# Altium PCB bob_breakout-layout.PcbDoc (part 1 of 2)
Units mil, origin at the board's own origin, x right, y up, seen from the top; angles counter-clockwise.
Board outline 6141.73 x 4531.01 mil, 4 copper layers (Top Copper, Signal Layer 1, Signal Layer 2, Bottom Copper), stack 61.811 mil thick; 106 components, 121 nets, 504 pads, 390 vias.
Unrouted connection lines stored in the file: 19.
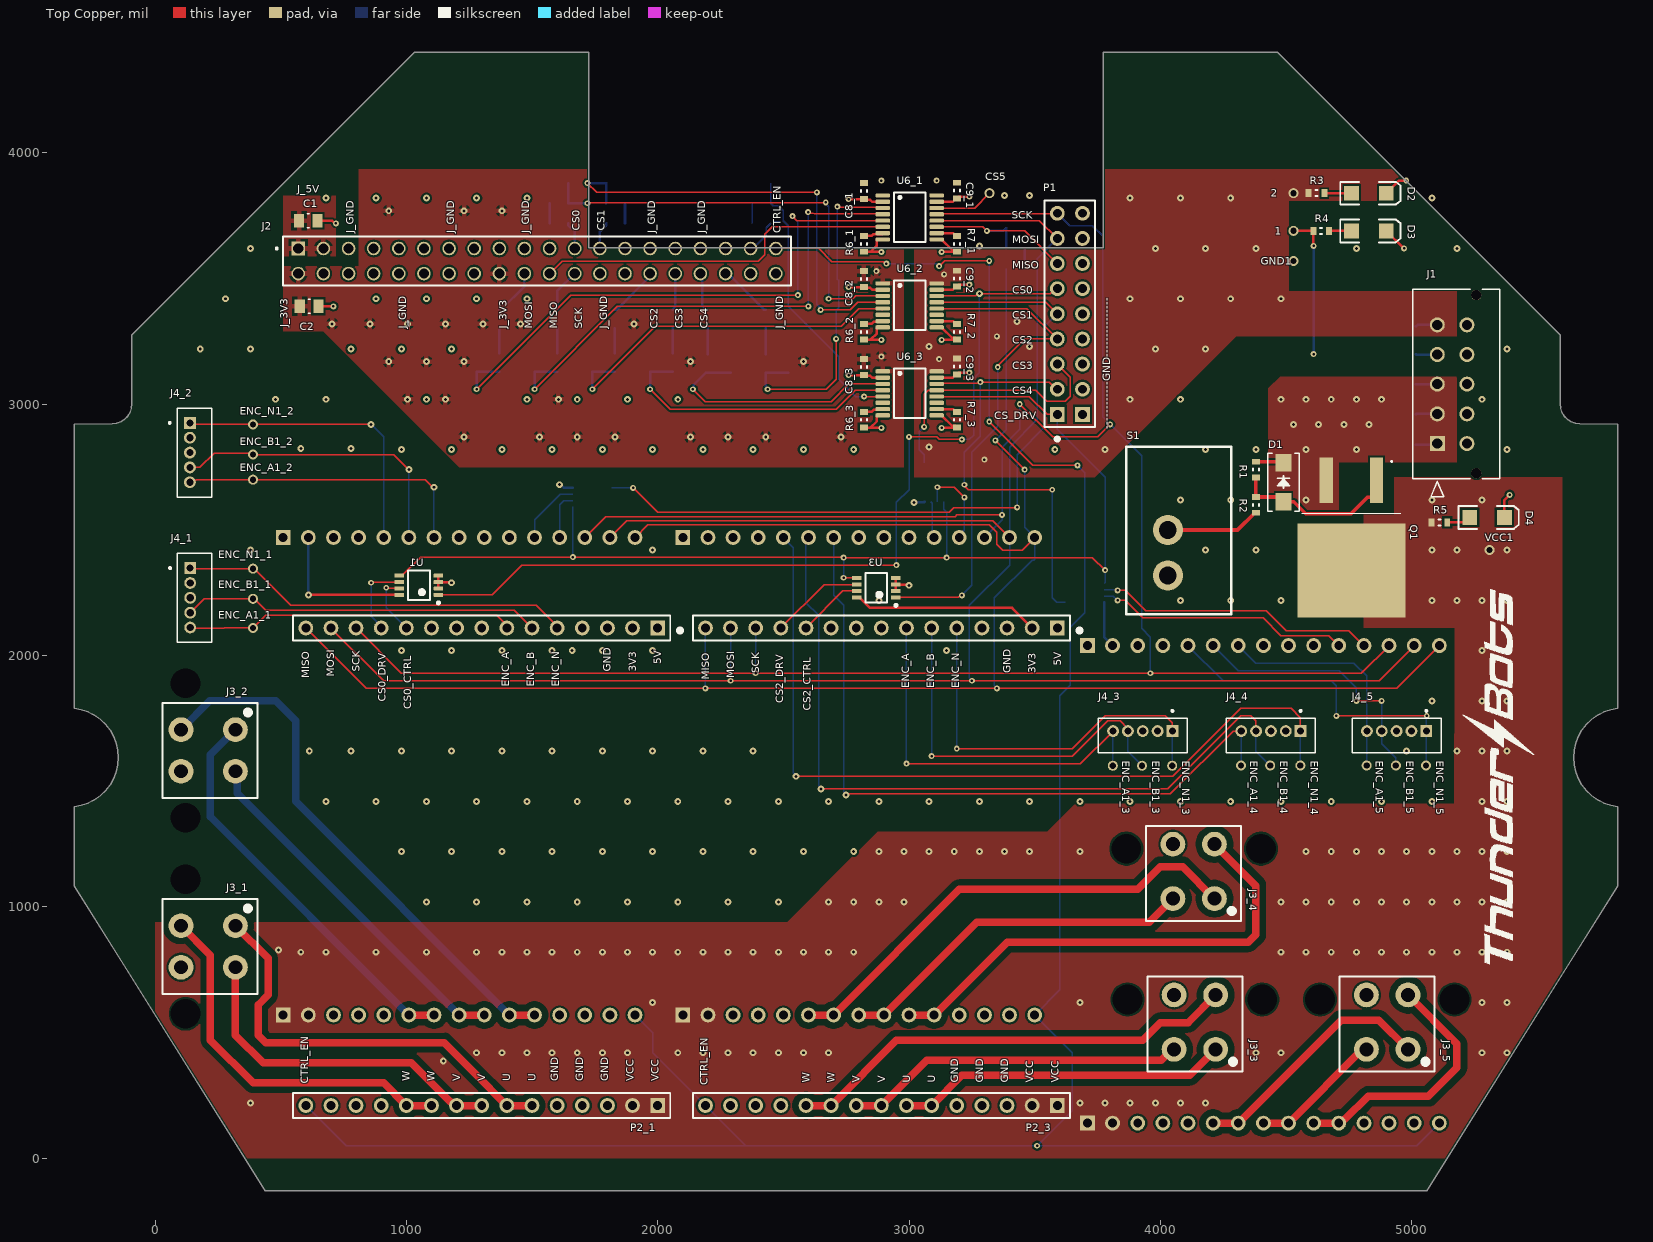
[diagram p0: Top Copper view]
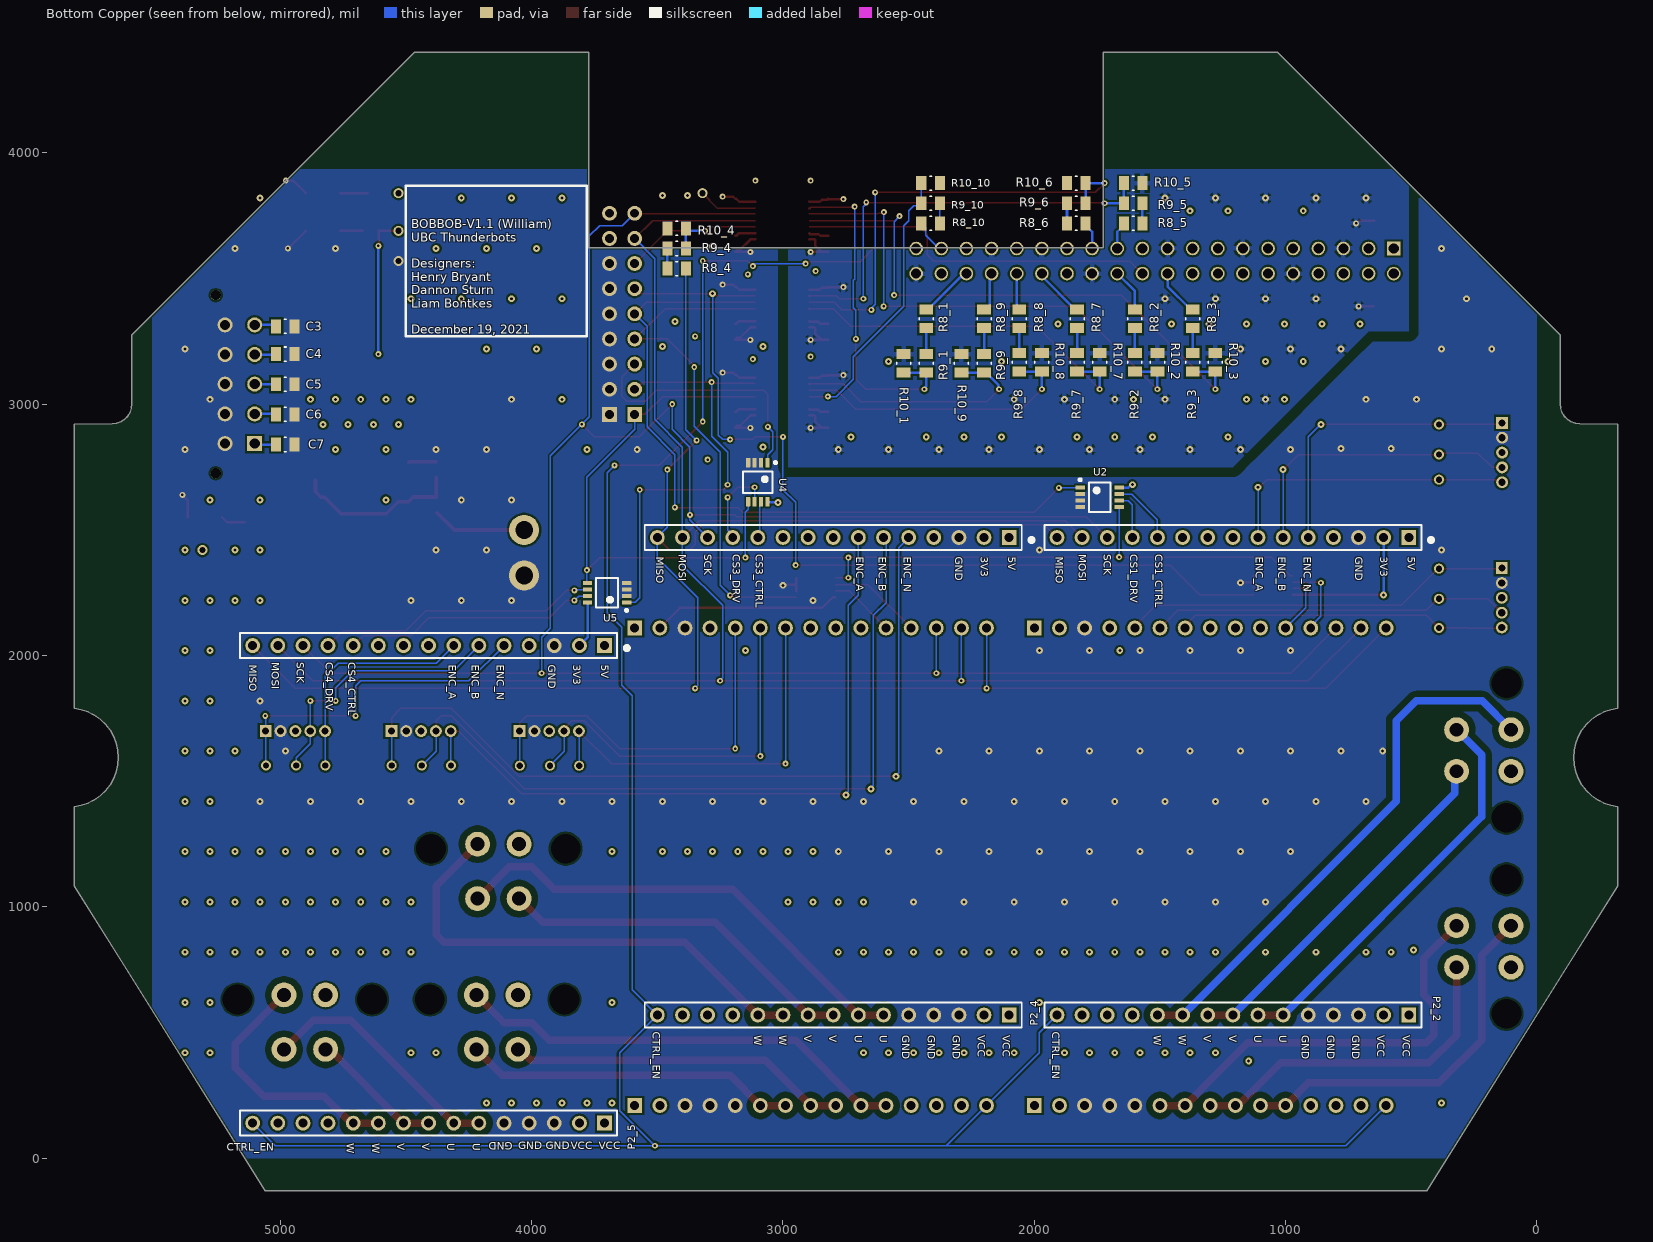
[diagram p1: Bottom Copper view, seen from below]
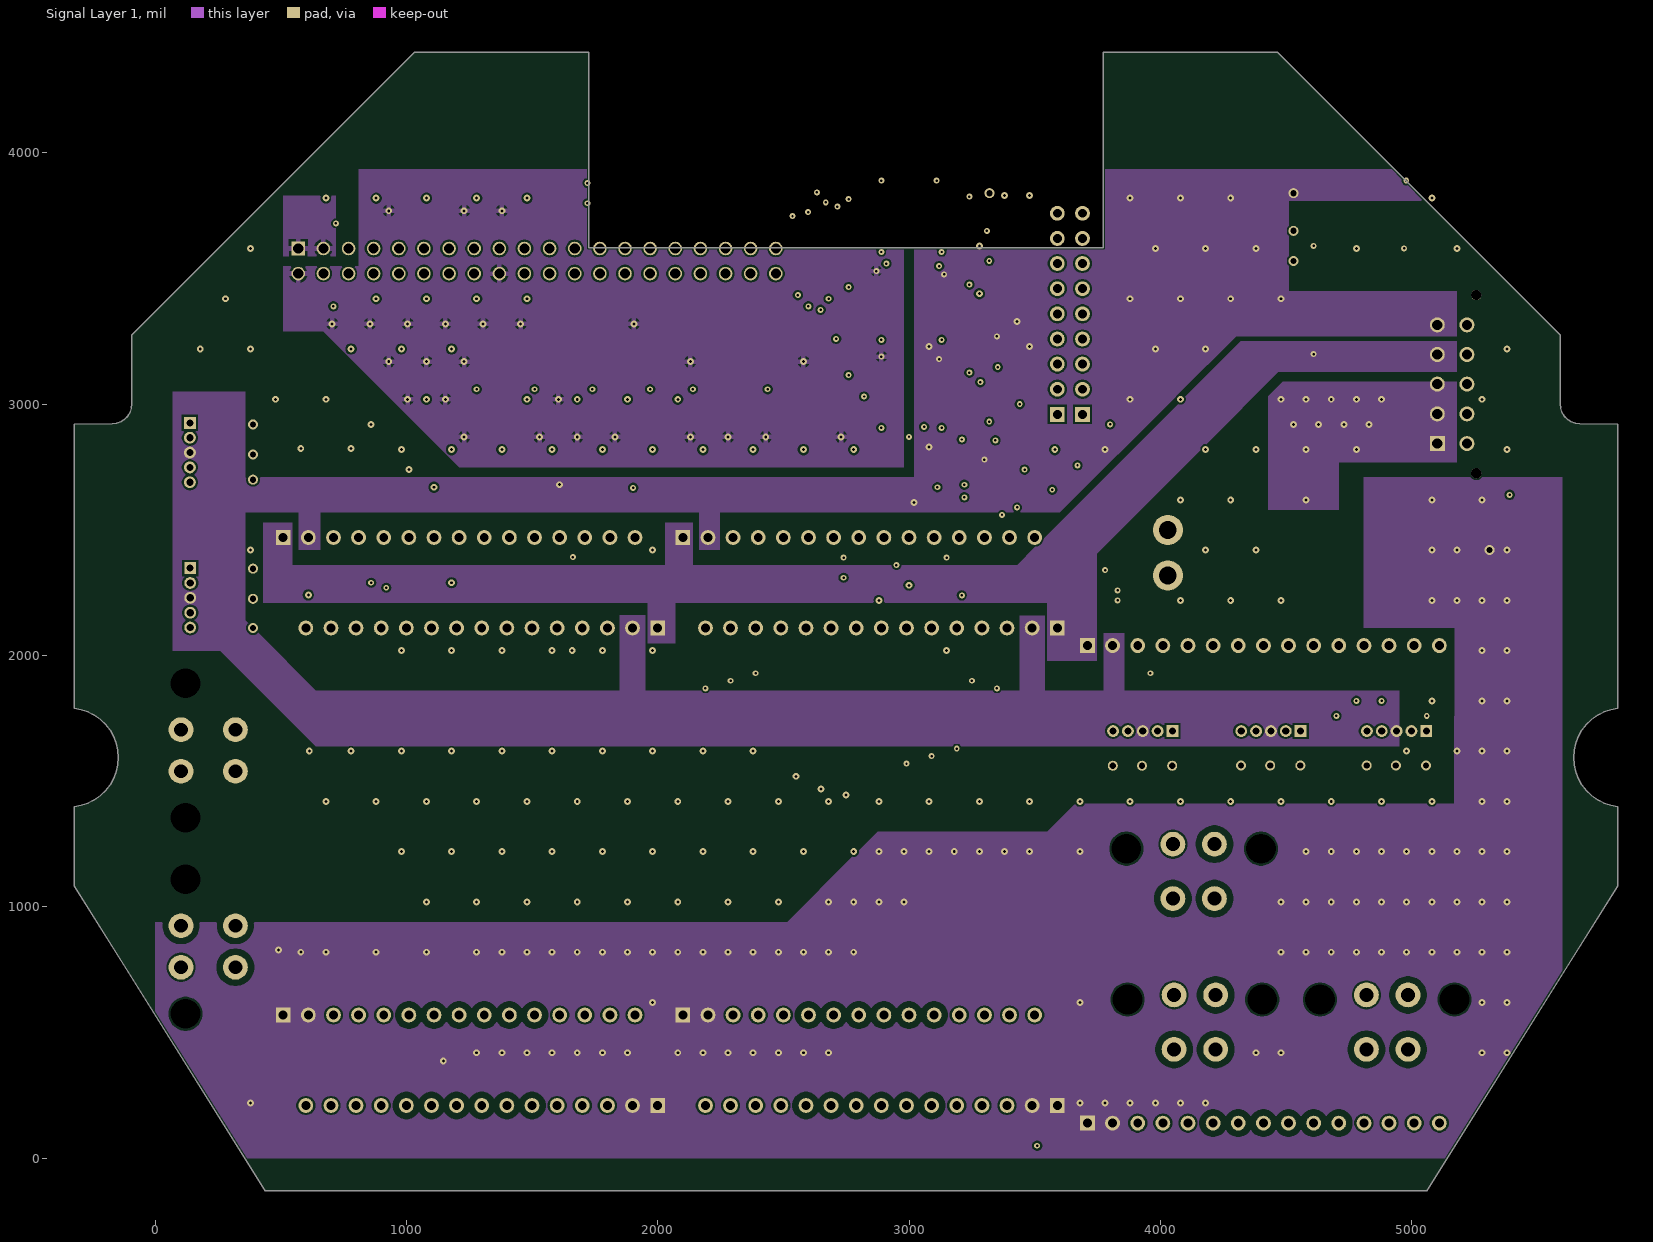
[diagram p2: Signal Layer 1]
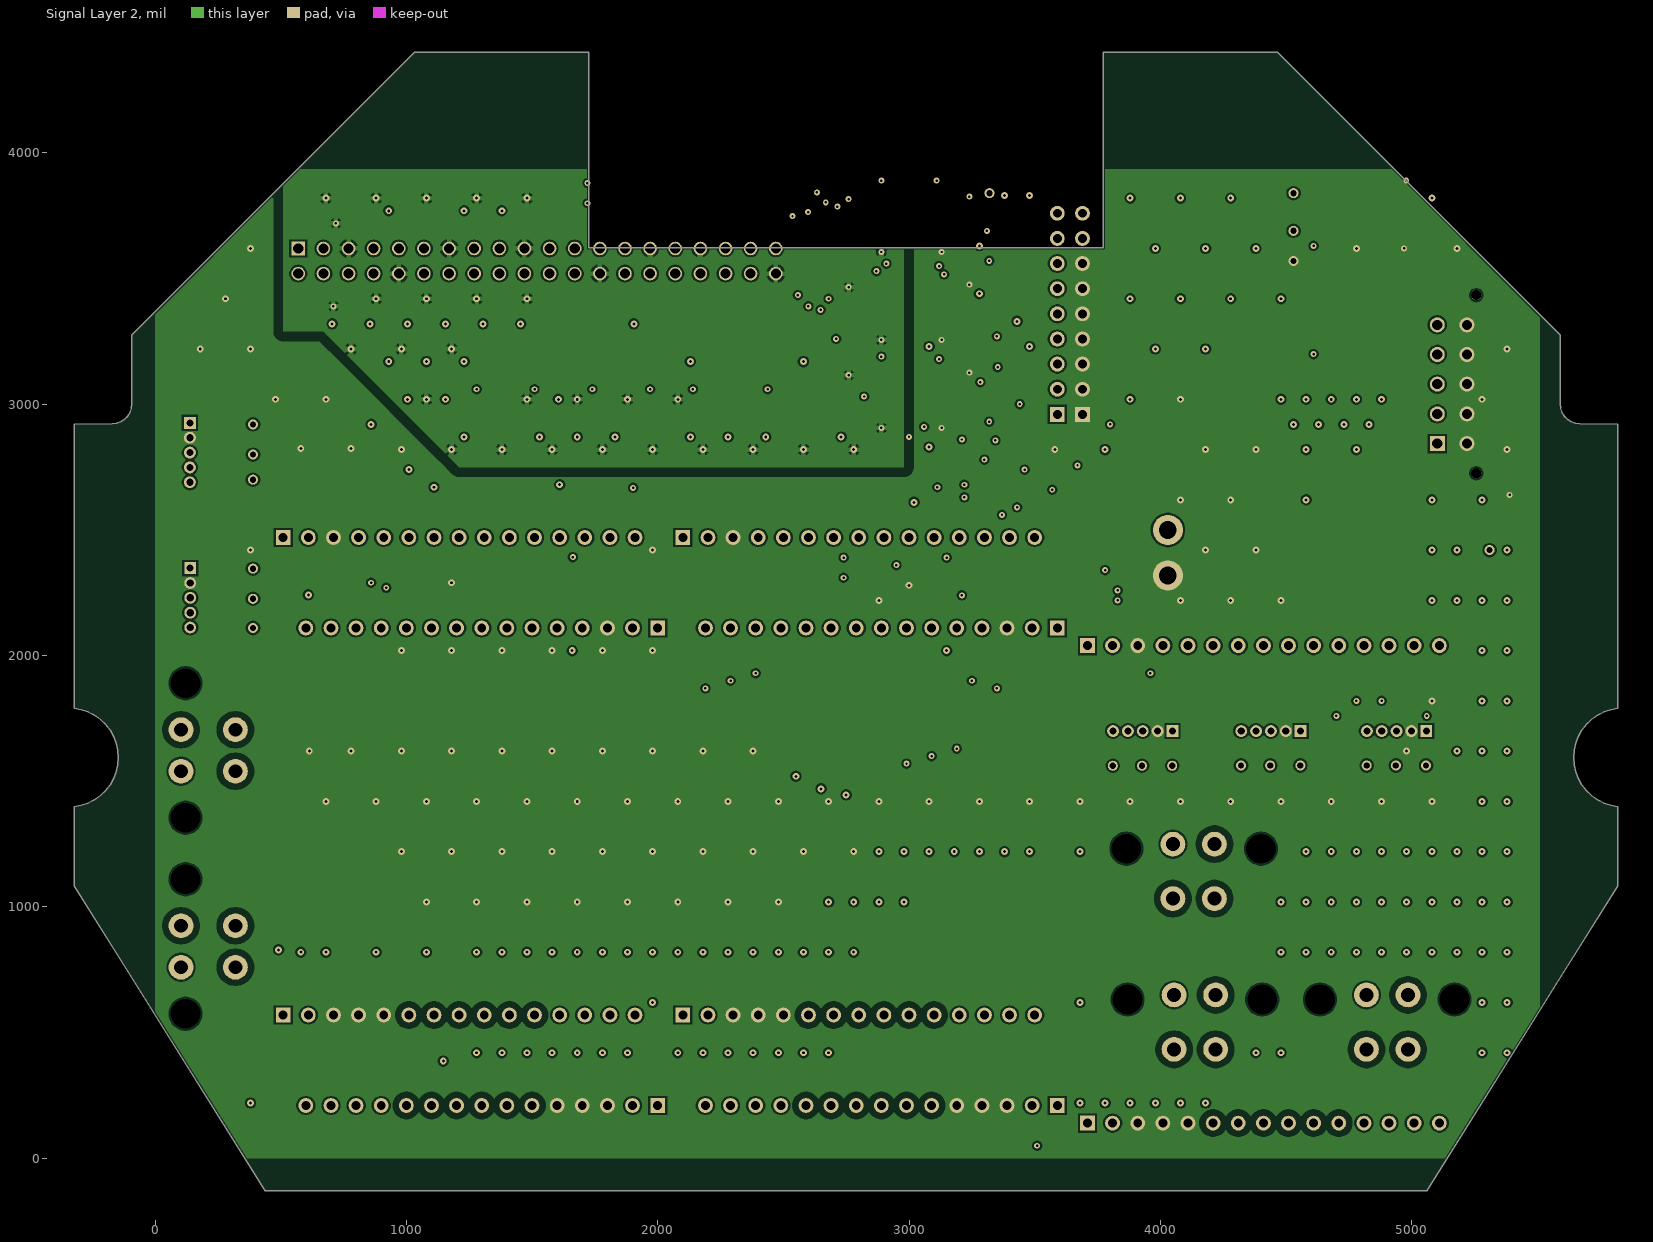
[diagram p3: Signal Layer 2]

## Layer stack, top to bottom
Top Mask: solder mask 0.5906, Solder Resist, Dk 3.8
Top Copper: signal copper 1.378
Dielectric 1: prepreg 3.937, 2313, Dk 4.05
Signal Layer 1: signal copper 0.689
Core: core 49.8031, FR-4, Dk 4.5
Signal Layer 2: signal copper 0.689
Dielectric 2: prepreg 3.937, 2313, Dk 4.05
Bottom Copper: signal copper 1.378
Bottom Mask: solder mask 0.5906, Solder Resist, Dk 3.8

## Board outline
-321.57,1084.08 -321.57,1399.04 -293.3,1404.24 -266.06,1413.49 -240.47,1426.6 -217.04,1443.33 -196.33,1463.29 -178.74,1486.05 -164.68,1511.09 -154.4,1537.98 -148.14,1566.05 -146.02,1594.71 -148.14,1623.41 -154.4,1651.48 -164.68,1678.33 -178.74,1703.41 -196.33,1726.17 -217.04,1746.13 -240.47,1762.82 -266.06,1775.97 -293.3,1785.22 -321.57,1790.42 -321.57,2921.01 -170.35,2922.78 -152.83,2924.75 -136.18,2930.57 -121.26,2939.94 -108.77,2952.43 -99.4,2967.35 -93.58,2984 -91.61,3001.52 -91.61,3276.44 1032.96,4401.01 1725.67,4401.01 1725.67,3622.35 3772.92,3622.35 3772.92,4401.01 4465.58,4401.01 5590.2,3276.44 5590.2,3001.52 5592.17,2984 5598,2967.35 5607.37,2952.43 5619.85,2939.94 5634.77,2930.57 5651.42,2924.75 5668.94,2922.78 5820.16,2921.01 5820.16,1790.42 5791.86,1785.22 5764.65,1775.97 5739.06,1762.86 5715.63,1746.13 5694.93,1726.17 5677.33,1703.41 5663.27,1678.33 5653,1651.48 5646.74,1623.41 5644.61,1594.71 5646.74,1566.05 5653,1537.98 5663.27,1511.09 5677.33,1486.05 5694.93,1463.29 5715.63,1443.33 5739.06,1426.6 5764.65,1413.49 5791.86,1404.24 5820.16,1399.04 5820.16,1084.08 5609.93,748.33 5060,-130 438.59,-130 -111.33,748.33

## Design rules (kind name [scope] priority, off if disabled: settings)
BoardOutlineClearance [All] p1: gap=7.87 ignorepadtopadclearanceinfootprint=FALSE except(15.75: Arc-SplitBarrior Arc-SplitContinuation Track-SplitBarrior Track-SplitContinuation SMDPad-SplitBarrior SMDPad-SplitContinuation THPad-SplitBarrior THPad-SplitContinuation Via-SplitBarrior Via-SplitContinuation Fill-SplitBarrior Fill-SplitContinuation Poly-SplitBarrior Poly-SplitContinuation Region-SplitBarrior Region-SplitContinuation Text-SplitBarrior Text-SplitContinuation)
Clearance "Stitching VCC" [IsStitchingVia and InNet('VCC') vs (IsVia and (Not IsStitchingVia)) Or IsPad] p1: gap=20 ignorepadtopadclearanceinfootprint=FALSE
Clearance Clearance_Phases [InNetClass('Phases')] p2: gap=25 ignorepadtopadclearanceinfootprint=TRUE except(10: Arc-THPad Arc-Hole Track-THPad Track-Hole SMDPad-Hole THPad-Hole Via-Hole Fill-Hole Poly-Hole Region-Hole Text-Hole)
Clearance Clearance_Region_Poly_VCC [IsRegion AND (InNetClass('VCC')) vs IsRegion] p3: gap=40 ignorepadtopadclearanceinfootprint=TRUE
Clearance [All] p4: gap=8 ignorepadtopadclearanceinfootprint=TRUE except(10: Arc-Text Track-Text SMDPad-Text THPad-Text Via-Text Fill-Text Poly-Text Region-Text Text-Text)
HoleSize [All] p1: absolutevalues=TRUE maxlimit=248.03 minlimit=7.87 maxpercent=80.000 minpercent=20.000
MinimumAnnularRing [All] p1: minimumring=3
MinimumSolderMaskSliver [All] p1: minsoldermaskwidth=3.94
PolygonConnect PolygonConnect_VCC [All vs InNet('VCC')] p1: connectstyle=Direct reliefconductorwidth=20 reliefentries=4 polygonreliefangle="90 Angle" airgapwidth=10
PolygonConnect PolygonConnect_5V [All vs InNet('5V')] p2: connectstyle=Direct reliefconductorwidth=20 reliefentries=4 polygonreliefangle="90 Angle" airgapwidth=10
PolygonConnect PolygonConnect_3V3 [All vs InNet('3V3')] p3: connectstyle=Direct reliefconductorwidth=20 reliefentries=4 polygonreliefangle="90 Angle" airgapwidth=10
PolygonConnect PolygonConnect_GND [All vs InNet('GND')] p4: connectstyle=Direct reliefconductorwidth=20 reliefentries=4 polygonreliefangle="90 Angle" airgapwidth=10
PolygonConnect PolygonConnect_VCC_CONN [All vs InNet('VCC_CONN')] p5: connectstyle=Direct reliefconductorwidth=20 reliefentries=4 polygonreliefangle="90 Angle" airgapwidth=10
PolygonConnect PolygonConnect_5V_CONN [All vs InNet('5V_CONN')] p6: connectstyle=Direct reliefconductorwidth=20 reliefentries=4 polygonreliefangle="90 Angle" airgapwidth=10
PolygonConnect PolygonConnect_3V3_CONN [All vs InNet('3V3_CONN')] p7: connectstyle=Direct reliefconductorwidth=20 reliefentries=4 polygonreliefangle="90 Angle" airgapwidth=10
PolygonConnect [All] p8: connectstyle=Relief reliefconductorwidth=20 reliefentries=4 polygonreliefangle="90 Angle" airgapwidth=10
RoomDefinition U_bob_encoder_4 [InComponentClass('U_bob_encoder_4')] p1: confinementstyle=ConfineIn formatcopy=TRUE lockcomponents=FALSE outline 4741.06,1807.44 5137.05,1807.44 5137.05,1602.04 5091.17,1602.04 5091.17,1528.83 4786.94,1528.83 4786.94,1602.04 4741.06,1602.04
RoomDefinition U_bob_encoder_2 [InComponentClass('U_bob_encoder_2')] p2: confinementstyle=ConfineIn formatcopy=TRUE lockcomponents=FALSE outline 3731.06,1806.5 4127.05,1806.5 4127.05,1601.09 4081.17,1601.09 4081.17,1527.89 3776.94,1527.89 3776.94,1601.09 3731.06,1601.09
RoomDefinition U_bob_encoder_3 [InComponentClass('U_bob_encoder_3')] p3: confinementstyle=ConfineIn formatcopy=TRUE lockcomponents=FALSE outline 4241.06,1807.44 4637.05,1807.44 4637.05,1602.04 4591.17,1602.04 4591.17,1528.83 4286.94,1528.83 4286.94,1602.04 4241.06,1602.04
RoomDefinition U_bob_encoder_1 [InComponentClass('U_bob_encoder_1')] p4: confinementstyle=ConfineIn formatcopy=TRUE lockcomponents=FALSE outline 30,3020 390,3020 440,2970 440,2610 400,2570 30,2570
RoomDefinition U_bob_encoder_0 [InComponentClass('U_bob_encoder_0')] p5: confinementstyle=ConfineIn formatcopy=TRUE lockcomponents=FALSE outline 40,2440 40,2000 60,1980 460,1980 460,2440
RoomDefinition U_low-pass-filter_9 [InComponentClass('U_low-pass-filter_9')] p6: confinementstyle=ConfineIn formatcopy=TRUE lockcomponents=FALSE outline 2150,3668 2830,3668 2830,3928 2150,3928
RoomDefinition U_isolation_1 [InComponentClass('U_isolation_1')] p7: confinementstyle=ConfineIn formatcopy=TRUE lockcomponents=FALSE outline 2730,3227.01 3276.44,3227.01 3276.44,3570 2730,3570
RoomDefinition U_low-pass-filter_5 [InComponentClass('U_low-pass-filter_5')] p8: confinementstyle=ConfineIn formatcopy=TRUE lockcomponents=FALSE outline 1756,3930 2086,3930 2086,3670 1756,3670
RoomDefinition U_low-pass-filter_6 [InComponentClass('U_low-pass-filter_6')] p9: confinementstyle=ConfineIn formatcopy=TRUE lockcomponents=FALSE outline 1640,2900 1870,2900 1870,3440 1640,3440
RoomDefinition U_isolation_0 [InComponentClass('U_isolation_0')] p10: confinementstyle=ConfineIn formatcopy=TRUE lockcomponents=FALSE outline 2730,3577.01 3276.44,3577.01 3276.44,3920 2730,3920
RoomDefinition U_low-pass-filter_4 [InComponentClass('U_low-pass-filter_4')] p11: confinementstyle=ConfineIn formatcopy=TRUE lockcomponents=FALSE outline 1680,3930 1354,3930 1354,3670 1680,3670
RoomDefinition U_low-pass-filter_8 [InComponentClass('U_low-pass-filter_8')] p12: confinementstyle=ConfineIn formatcopy=TRUE lockcomponents=FALSE outline 2100,2900 2330,2900 2330,3440 2100,3440
RoomDefinition U_low-pass-filter_1 [InComponentClass('U_low-pass-filter_1')] p13: confinementstyle=ConfineIn formatcopy=TRUE lockcomponents=FALSE outline 1410,2900 1640,2900 1640,3440 1410,3440
RoomDefinition U_low-pass-filter_2 [InComponentClass('U_low-pass-filter_2')] p14: confinementstyle=ConfineIn formatcopy=TRUE lockcomponents=FALSE outline 1180,2900 1410,2900 1410,3440 1180,3440
RoomDefinition U_low-pass-filter_7 [InComponentClass('U_low-pass-filter_7')] p15: confinementstyle=ConfineIn formatcopy=TRUE lockcomponents=FALSE outline 1870,2900 2100,2900 2100,3440 1870,3440
RoomDefinition U_low-pass-filter_0 [InComponentClass('U_low-pass-filter_0')] p16: confinementstyle=ConfineIn formatcopy=TRUE lockcomponents=FALSE outline 2330,2900 2560,2900 2560,3440 2330,3440
RoomDefinition U_low-pass-filter_3 [InComponentClass('U_low-pass-filter_3')] p17: confinementstyle=ConfineIn formatcopy=TRUE lockcomponents=FALSE outline 3160,3490 3497,3490 3497,3750 3160,3750
RoomDefinition U_isolation_2 [InComponentClass('U_isolation_2')] p18: confinementstyle=ConfineIn formatcopy=TRUE lockcomponents=FALSE outline 2730,2877.01 3276.44,2877.01 3276.44,3220 2730,3220
RoutingCorners [All] p1: cornerstyle=Round minsetback=100 maxsetback=100
RoutingVias [All] p1: holewidth=19.68 width=39.37 viastyle="Through Hole" minholewidth=7.87 minwidth=17.72 maxholewidth=39.37 maxwidth=78.74
SilkToSilkClearance [All] p1: silktosilkclearance=3.94
SilkToSolderMaskClearance [IsPad] p1: minsilkscreentomaskgap=3.94 clearancetoexposedcopper=TRUE
SolderMaskExpansion [All] p1: expansion=4 istentingtop=FALSE
Width Width_LOGICPWR [InNetClass('LOGICPWR')] p1: maxlimit=30 minlimit=10 preferedwidth=20
Width Width_Signals [InNetClass('Signals')] p2: maxlimit=10 minlimit=3.5 preferedwidth=5
Width Width_VCC [InNetClass('VCC')] p3: maxlimit=30 minlimit=10 preferedwidth=20
Width WidthPhases [InNetClass('Phases')] p4: maxlimit=40 minlimit=20 preferedwidth=30
Width [All] p5: maxlimit=100 minlimit=3.5 preferedwidth=15
25 further rules are at their usual default settings.

## Classes and differential pairs
channel class bob_encoder: U_bob_encoder_0 U_bob_encoder_1 U_bob_encoder_2 U_bob_encoder_3 U_bob_encoder_4
component class U_bob_4: J3_5 P2_5
component class U_bob_3: J3_4 P2_4
component class U_bob_2: J3_3 P2_3
component class U_bob_1: J3_2 P2_2
component class U_bob_0: J3_1 P2_1
component class U_low-pass-filter_9: R8_10 R9_10 R10_10
net class LOGICPWR: 3V3 5V
net class Signals: CTRL_EN ENC_1_N ENC_2_N ENC_3_N ENC_4_N ENC_5_N ENC_A_1 ENC_A_2 ENC_A_3 ENC_A_4 ENC_A_5 ENC_B_1 ENC_B_2 ENC_B_3 ENC_B_4 ENC_B_5 SPI_1_CS0 SPI_1_CS0_CTRL SPI_1_CS0_DRV SPI_1_CS0_FILTER SPI_1_CS0_ISO SPI_1_CS1 SPI_1_CS1_CTRL SPI_1_CS1_DRV SPI_1_CS1_FILTER SPI_1_CS1_ISO SPI_1_CS2_CTRL SPI_1_CS2_DRV SPI_1_CS2_FILTER SPI_1_CS2_ISO SPI_1_CS3_CTRL SPI_1_CS3_DRV SPI_1_CS3_FILTER SPI_1_CS3_ISO SPI_1_CS4_CTRL SPI_1_CS4_DRV SPI_1_CS4_FILTER SPI_1_CS4_ISO SPI_1_CS5_FILTER SPI_1_CS5_ISO SPI_1_MISO SPI_1_MISO_FILTER SPI_1_MISO_ISO SPI_1_MOSI SPI_1_MOSI_FILTER SPI_1_MOSI_ISO SPI_1_MUX_SEL_FILTER SPI_1_MUX_SEL_ISO SPI_1_SCK SPI_1_SCK_FILTER SPI_1_SCK_ISO SPI_2_CS0 SPI_2_CS1 SPI_2_MISO SPI_2_MOSI SPI_2_SCK
net class Phases: U_1 U_2 U_3 U_4 U_5 V_1 V_2 V_3 V_4 V_5 W_1 W_2 W_3 W_4 W_5
net class VCC: GND VCC VCC_CONN
channel class bob_v2: U_bob_encoder_0 U_bob_encoder_1 U_bob_encoder_2 U_bob_encoder_3 U_bob_encoder_4
channel class low-pass-filter: U_low-pass-filter_0 U_low-pass-filter_1 U_low-pass-filter_2 U_low-pass-filter_3 U_low-pass-filter_4 U_low-pass-filter_5 U_low-pass-filter_6 U_low-pass-filter_7 U_low-pass-filter_8
component class U_low-pass-filter_8: R8_9 R9_9 R10_9
component class U_low-pass-filter_7: R8_8 R9_8 R10_8
component class U_low-pass-filter_6: R8_7 R9_7 R10_7
component class U_low-pass-filter_5: R8_6 R9_6 R10_6
component class U_low-pass-filter_4: R8_5 R9_5 R10_5
component class U_low-pass-filter_3: R8_4 R9_4 R10_4
component class U_low-pass-filter_2: R8_3 R9_3 R10_3
component class U_low-pass-filter_1: R8_2 R9_2 R10_2
component class U_low-pass-filter_0: R8_1 R9_1 R10_1
component class U_isolation_2: C8_3 C9_3 R6_3 R7_3 U6_3
component class U_isolation_1: C8_2 C9_2 R6_2 R7_2 U6_2
component class U_isolation_0: C8_1 C9_1 R6_1 R7_1 U6_1
component class U_bob_encoder_0: ENC_A1_1 ENC_B1_1 ENC_N1_1 J4_1
channel class isolation: U_isolation1 U_isolation2 U_isolation3
component class U_ui: J2
component class U_power: 1 2 C3 C4 C5 C6 C7 D1 D2 D3 D4 GND1 J1 Q1 R1 R2 R3 R4 R5 S1 VCC1
component class U_jetson-nano: C1 C2 CS5 P1 U1 U2 U3 U4 U5
component class U_bob_encoder_1: ENC_A1_2 ENC_B1_2 ENC_N1_2 J4_2
component class U_bob_encoder_2: ENC_A1_3 ENC_B1_3 ENC_N1_3 J4_3
component class U_bob_encoder_3: ENC_A1_4 ENC_B1_4 ENC_N1_4 J4_4
component class U_bob_encoder_4: ENC_A1_5 ENC_B1_5 ENC_N1_5 J4_5

## Components (designator, comment, footprint, x,y, rotation, side; value= is the part's Value field where it differs from the comment)
1 "Test Point (Via)" TP 4530,3690 r0 top
2 "Test Point (Via)" TP 4530,3840 r0 top
C1 "0.1uF 25V" 0805 610,3730 r0 top value=0.1uF
C2 "0.1uF 25V" 0805 613,3390 r0 top value=0.1uF
C3 "0.1uF 25V" 0805 4980,3310 r180 bottom value=0.1uF
C4 "0.1uF 25V" 0805 4980,3200 r180 bottom value=0.1uF
C5 "0.1uF 25V" 0805 4980,3080 r180 bottom value=0.1uF
C6 "0.1uF 25V" 0805 4980,2960 r180 bottom value=0.1uF
C7 "0.1uF 25V" 0805 4980,2840 r180 bottom value=0.1uF
C8_1 "0.10uF" 0603 2820.59,3848.5 r90 top (schematic designator C8)
C8_2 "0.10uF" 0603 2820.59,3498.5 r90 top (schematic designator C8)
C8_3 "0.10uF" 0603 2820.59,3148.5 r90 top (schematic designator C8)
C9_1 "0.10uF" 0603 3190.59,3850 r90 top (schematic designator C9)
C9_2 "0.10uF" 0603 3190.59,3500 r90 top (schematic designator C9)
C9_3 "0.10uF" 0603 3190.59,3150 r90 top (schematic designator C9)
CS5 "Test Point (Via)" TP 3320,3840 r0 top
D1 "SMAZ12-13-F" SMA_DIO-L 4490,2690 r270 top
D2 "LED2" 3.2X1.6X1.1 4830,3840 r0 top
D3 "LED2" 3.2X1.6X1.1 4830,3690 r0 top
D4 "LED2" 3.2X1.6X1.1 5300,2550 r0 top
ENC_A1_1 "Test Point (Via)" TP 390,2110 r0 top (schematic designator ENC_A1)
ENC_A1_2 "Test Point (Via)" TP 390,2700 r0 top (schematic designator ENC_A1)
ENC_A1_3 "Test Point (Via)" TP 3810.94,1561.89 r270 top (schematic designator ENC_A1)
ENC_A1_4 "Test Point (Via)" TP 4320.94,1562.83 r270 top (schematic designator ENC_A1)
ENC_A1_5 "Test Point (Via)" TP 4820.94,1562.83 r270 top (schematic designator ENC_A1)
ENC_B1_1 "Test Point (Via)" TP 390,2226.22 r0 top (schematic designator ENC_B1)
ENC_B1_2 "Test Point (Via)" TP 390,2800 r0 top (schematic designator ENC_B1)
ENC_B1_3 "Test Point (Via)" TP 3927.17,1561.89 r270 top (schematic designator ENC_B1)
ENC_B1_4 "Test Point (Via)" TP 4437.17,1562.83 r270 top (schematic designator ENC_B1)
ENC_B1_5 "Test Point (Via)" TP 4937.17,1562.83 r270 top (schematic designator ENC_B1)
ENC_N1_1 "Test Point (Via)" TP 390,2346.22 r0 top (schematic designator ENC_N1)
ENC_N1_2 "Test Point (Via)" TP 390,2920 r0 top (schematic designator ENC_N1)
ENC_N1_3 "Test Point (Via)" TP 4047.17,1561.89 r270 top (schematic designator ENC_N1)
ENC_N1_4 "Test Point (Via)" TP 4557.17,1562.83 r270 top (schematic designator ENC_N1)
ENC_N1_5 "Test Point (Via)" TP 5057.17,1562.83 r270 top (schematic designator ENC_N1)
GND1 "Test Point (Via)" TP 4530,3570 r90 top
J1 "8A Molex" MOLEX_0430451012 5101.89,2843.78 r270 top
J2 "CN HDR 40POS TH" SAMTEC_SSQ-120-22-G-D 1520,3570 r180 top
J3_1 "39299044" 39299044 320,925.35 r90 top (schematic designator J3)
J3_2 "39299044" 39299044 320,1705.35 r90 top (schematic designator J3)
J3_3 "39299044" 39299044 4220,433.46 r0 top (schematic designator J3)
J3_4 "39299044" 39299044 4215.35,1033.46 r0 top (schematic designator J3)
J3_5 "39299044" 39299044 4985.35,433.46 r0 top (schematic designator J3)
J4_1 "B5B-ZR(LF)(SN)" JST_B5B-ZR(LF)(SN) 140,2348.11 r270 top (schematic designator J4)
J4_2 "B5B-ZR(LF)(SN)" JST_B5B-ZR(LF)(SN) 138.83,2926.1 r270 top (schematic designator J4)
J4_3 "B5B-ZR(LF)(SN)" JST_B5B-ZR(LF)(SN) 4048.11,1700 r180 top (schematic designator J4)
J4_4 "B5B-ZR(LF)(SN)" JST_B5B-ZR(LF)(SN) 4558.11,1700 r180 top (schematic designator J4)
J4_5 "B5B-ZR(LF)(SN)" JST_B5B-ZR(LF)(SN) 5058.11,1700 r180 top (schematic designator J4)
P1 "CN HDR 18POS 2x9" HDR2x9 3590,2960 r90 top
P2_1 "HDR 1x15" TRINAMIC_BOB 2000,2110 r180 top (schematic designator P2)
P2_2 "HDR 1x15" TRINAMIC_BOB 510,2470 r0 bottom locked (schematic designator P2)
P2_3 "HDR 1x15" TRINAMIC_BOB 3590,2110 r180 top (schematic designator P2)
P2_4 "HDR 1x15" TRINAMIC_BOB 2100,2470 r0 bottom locked (schematic designator P2)
P2_5 "HDR 1x15" TRINAMIC_BOB 3710,2040 r0 bottom locked (schematic designator P2)
Q1 "IPB80P03P4L-04" IPB80P03P4L04 4760,2450 r180 top
R1 "47k" 0603 4380,2740 r270 top
R2 "100k" 0603 4380,2600 r270 top
R3 "110" 0603 4621.5,3840 r180 top
R4 "330" 0603 4640,3690 r180 top
R5 "1.96K" 0603 5110,2530 r180 top value=1.96k
R6_1 "4.7k" 0603 2820.59,3638.5 r270 top (schematic designator R6)
R6_2 "4.7k" 0603 2820.59,3288.5 r270 top (schematic designator R6)
R6_3 "4.7k" 0603 2820.59,2938.5 r270 top (schematic designator R6)
R7_1 "4.7k" 0603 3190.59,3638.5 r270 top (schematic designator R7)
R7_2 "4.7k" 0603 3190.59,3288.5 r270 top (schematic designator R7)
R7_3 "4.7k" 0603 3190.59,2938.5 r270 top (schematic designator R7)
R8_1 "22" 0805 2430,3340 r90 bottom (schematic designator R8)
R8_2 "22" 0805 1600,3340 r90 bottom (schematic designator R8)
R8_3 "22" 0805 1370,3340 r90 bottom (schematic designator R8)
R8_4 "22" 0805 3423,3540 r180 bottom (schematic designator R8)
R8_5 "22" 0805 1607,3720 r0 bottom (schematic designator R8)
R8_6 "22" 0805 1833,3720 r180 bottom (schematic designator R8)
R8_7 "22" 0805 1830,3340 r90 bottom (schematic designator R8)
R8_8 "22" 0805 2060,3340 r90 bottom (schematic designator R8)
R8_9 "22" 0805 2200,3340 r90 bottom (schematic designator R8)
R8_10 "22" 0805 2413,3720 r0 bottom (schematic designator R8)
R9_1 "JUMPER" 0805 2430,3163 r90 bottom value=0 (schematic designator R9)
R9_2 "JUMPER" 0805 1600,3167 r90 bottom value=0 (schematic designator R9)
R9_3 "JUMPER" 0805 1370,3167 r90 bottom value=0 (schematic designator R9)
R9_4 "JUMPER" 0805 3423,3620 r0 bottom value=0 (schematic designator R9)
R9_5 "JUMPER" 0805 1607,3800 r180 bottom value=0 (schematic designator R9)
R9_6 "JUMPER" 0805 1833,3800 r0 bottom value=0 (schematic designator R9)
R9_7 "JUMPER" 0805 1830,3167 r90 bottom value=0 (schematic designator R9)
R9_8 "JUMPER" 0805 2060,3167 r90 bottom value=0 (schematic designator R9)
R9_9 "JUMPER" 0805 2200,3163 r90 bottom value=0 (schematic designator R9)
R9_10 "JUMPER" 0805 2413,3800 r180 bottom value=0 (schematic designator R9)
R10_1 "JUMPER" 0805 2520,3163 r90 bottom value=0 (schematic designator R10)
R10_2 "JUMPER" 0805 1510,3167 r90 bottom value=0 (schematic designator R10)
R10_3 "JUMPER" 0805 1280,3167 r90 bottom value=0 (schematic designator R10)
R10_4 "JUMPER" 0805 3423,3700 r0 bottom value=0 (schematic designator R10)
R10_5 "JUMPER" 0805 1607,3880 r180 bottom value=0 (schematic designator R10)
R10_6 "JUMPER" 0805 1833,3880 r0 bottom value=0 (schematic designator R10)
R10_7 "JUMPER" 0805 1740,3167 r90 bottom value=0 (schematic designator R10)
R10_8 "JUMPER" 0805 1970,3167 r90 bottom value=0 (schematic designator R10)
R10_9 "JUMPER" 0805 2290,3163 r90 bottom value=0 (schematic designator R10)
R10_10 "JUMPER" 0805 2413,3880 r180 bottom value=0 (schematic designator R10)
S1 "SPST 8.5A 125V" "SPST GF-123-0054" 4030,2319 r90 top
U1 "1:2 Mux/Demux" TSOP65P400X110-8N 1050,2280 r180 top
U2 "1:2 Mux/Demux" TSOP65P400X110-8N 1740,2630 r180 bottom
U3 "1:2 Mux/Demux" TSOP65P400X110-8N 2870,2270 r180 top
U4 "1:2 Mux/Demux" TSOP65P400X110-8N 3100,2690 r270 bottom
U5 "1:2 Mux/Demux" TSOP65P400X110-8N 3700,2250 r0 bottom
U6_1 "ADUM141D1BRQZ" SOP64P600X175-16N 3002.72,3743.5 r0 top (schematic designator U6)
U6_2 "ADUM141D1BRQZ" SOP64P600X175-16N 3002.72,3393.5 r0 top (schematic designator U6)
U6_3 "ADUM141D1BRQZ" SOP64P600X175-16N 3002.72,3043.5 r0 top (schematic designator U6)
VCC1 "Test Point (Via)" TP 5310,2420 r90 top

## Footprints (in the part's own frame and the unit in brackets; to place one, negate y for a bottom-side part, rotate by r counter-clockwise, add the part's x,y. Pads: shape width x height; smd on the part's side, far side on the other; paste and mask are expansions set on the pad)
3.2X1.6X1.1 [mm]
  rect 1.5x1.5 smd: 1(-1.75,0) 2(1.75,0)
  silkscreen extent -2.9,-1.15 3.2,1.15, body extent -1.68,-0.75 1.52,0.85, height 1.04
0603 [mm] "Chip Resistor, 2-Leads, Body 1.60x0.80mm, IPC High Density"
  rect 0.6x0.8 smd mask+0.1: 1(-0.8,0) 2(0.8,0)
  silkscreen extent -0.1,-0.3 0.1,0.3, body extent -0.8,-0.4 0.8,0.4, height 0.6
0805 [mil]
  rect 40x55 smd: 1(-37,0) 2(37,0)
  silkscreen extent -4,-28 4,28, body extent -47,-28 47,28, height 24
39299044 [mm] "4 POS MOLEX VERT"
  round 2.5 hole 1.4: 1(0,0) 2(-4.2,0) 3(0,5.5) 4(-4.2,5.5)
  round 0 hole 3 unplated: MH1(-8.9,5.04) MH1(4.7,5.04)
  silkscreen extent -6.9,-2.25 2.7,7.35, body extent -10.29,-2.25 6.09,8.75, height 12.8
HDR2x9 [mm]
  rect 1.5x1.5 hole 0.9: 1(0,0) 2(0,-2.54)
  round 1.5 hole 0.9: 3(2.54,0) 4(2.54,-2.54) 5(5.08,0) 6(5.08,-2.54) 7(7.62,0) 8(7.62,-2.54) 9(10.16,0) 10(10.16,-2.54) 11(12.7,0) 12(12.7,-2.54) 13(15.24,0) 14(15.24,-2.54) 15(17.78,0) 16(17.78,-2.54) 17(20.32,0) 18(20.32,-2.54)
  silkscreen extent -2.51,-3.81 21.59,1.27
IPB80P03P4L04 [mm]
  rect 1.35x4.6 smd: 1(-2.54,-6.3) 3(2.54,-6.3)
  rect 10.9x9.5 smd: 2(0,2.85)
  silkscreen extent -5,-8.25 5,-2.95, body extent -4.91,-7.72 4.91,6.87, height 4.22
JST_B5B-ZR(LF)(SN) [mm]
  rect 1.197x1.197 hole 0.7: 1(0,0)
  round 1.197 hole 0.73: 2(1.5,0) 3(3,0) 4(4.5,0) 5(6,0)
  silkscreen extent -1.5,-2.13 7.5,2.2, body extent -1.5,-1.3 7.5,2.2, height 4.51
MOLEX_0430451012 [mm]
  rect 1.52x1.52 hole 1.02 mask+0.076: 1(0,0)
  round 1.52 hole 1.02 mask+0.076: 2(-3,0) 3(-6,0) 4(-9,0) 5(-12,0) 6(0,3) 7(-3,3) 8(-6,3) 9(-9,3) 10(-12,3)
  round 1.02 hole 1.02 unplated mask+0.076: M1(3,3.94) M2(-15,3.94)
  silkscreen extent -15.57,-2.47 5.35,6.3, body extent -15.57,-2.47 3.58,6.3, height 9.95
SAMTEC_SSQ-120-22-G-D [mm]
  rect 1.37x1.37 hole 1.02: 01(24.13,-1.27)
  round 1.37 hole 1.02: 02(24.13,1.27) 03(21.59,-1.27) 04(21.59,1.27) 05(19.05,-1.27) 06(19.05,1.27) 07(16.51,-1.27) 08(16.51,1.27) 09(13.97,-1.27) 10(13.97,1.27) 11(11.43,-1.27) 12(11.43,1.27) 13(8.89,-1.27) 14(8.89,1.27) 15(6.35,-1.27) 16(6.35,1.27) 17(3.81,-1.27) 18(3.81,1.27) 19(1.27,-1.27) 20(1.27,1.27) 21(-1.27,-1.27) 22(-1.27,1.27) 23(-3.81,-1.27) 24(-3.81,1.27) 25(-6.35,-1.27) 26(-6.35,1.27) 27(-8.89,-1.27) 28(-8.89,1.27) 29(-11.43,-1.27) 30(-11.43,1.27) 31(-13.97,-1.27) 32(-13.97,1.27) 33(-16.51,-1.27) 34(-16.51,1.27) 35(-19.05,-1.27) 36(-19.05,1.27) 37(-21.59,-1.27) 38(-21.59,1.27) 39(-24.13,-1.27) 40(-24.13,1.27)
  silkscreen extent -25.66,-2.47 26.4,2.47, body extent -25.7,-2.53 25.7,2.47, height 11.06
SMA_DIO-L [mil]
  rect 70.84x62.17 smd paste+0 mask+0: 1(-77.62,0) 2(77.62,0)
  silkscreen extent -115,-62 115,62, body extent -110,-57 110,57, height 93
SOP64P600X175-16N [mm] "SOP, 16-Leads, Body 4.90x3.91mm, Pitch 0.64mm, IPC Medium Density"
  rrect50% 1.45x0.435 smd mask+0.05: 1(-2.725,2.222) 2(-2.725,1.587) 3(-2.725,0.953) 4(-2.725,0.318) 5(-2.725,-0.318) 6(-2.725,-0.953) 7(-2.725,-1.587) 8(-2.725,-2.222) 9(2.725,-2.222) 10(2.725,-1.587) 11(2.725,-0.953) 12(2.725,-0.318) 13(2.725,0.318) 14(2.725,0.953) 15(2.725,1.587) 16(2.725,2.222)
  silkscreen extent -1.6,-2.5 1.6,2.5, body extent -2,-2.5 2,2.5, height 1.76
"SPST GF-123-0054" [mil]
  round 120 hole 70: 0(0,0) 1(181,0)
  silkscreen extent -154,-252 512,165, body extent -145,-243 503,157, height 589
TP [mil] "Test point (40mil Standard)"
  round 40 hole 25: 1(0,0)
TRINAMIC_BOB [mm]
  rect 1.5x1.5 hole 0.9: 1(0,0) 16(0,48.26)
  round 1.5 hole 0.9: 2(2.54,0) 3(5.08,0) 4(7.62,0) 5(10.16,0) 6(12.7,0) 7(15.24,0) 8(17.78,0) 9(20.32,0) 10(22.86,0) 11(25.4,0) 12(27.94,0) 13(30.48,0) 14(33.02,0) 15(35.56,0) 17(2.54,48.26) 18(5.08,48.26) 19(7.62,48.26) 20(10.16,48.26) 21(12.7,48.26) 22(15.24,48.26) 23(17.78,48.26) 24(20.32,48.26) 25(22.86,48.26) 26(25.4,48.26) 27(27.94,48.26) 28(30.48,48.26) 29(33.02,48.26) 30(35.56,48.26)
  silkscreen extent -2.35,-1.27 36.83,49.53, body extent -1.27,-1.27 36.83,49.52, height 11
TSOP65P400X110-8N [mm] "TSOP, 8-Leads, Body 3.00x3.00mm, Pitch 0.65mm, IPC Medium Density"
  rrect20% 0.95x0.42 smd mask+0.065: 1(-1.975,0.975) 2(-1.975,0.325) 3(-1.975,-0.325) 4(-1.975,-0.975) 5(1.975,-0.975) 6(1.975,-0.325) 7(1.975,0.325) 8(1.975,0.975)
  silkscreen extent -2.1,-1.5 1.1,1.9, body extent -2,-1.5 2,1.5, height 1.1

## Part data
C1 C2 C3 C4 C5 C6 C7: library part "CAP 0.1uF 25V", "CAP CER 0.1UF 25V X7R 0805/0603", Operating Temperature="-55°C ~ 125°C", Rating=25V, Temperature Coefficient=X7R, Tolerance=10%
C8_1 C8_2 C8_3 C9_1 C9_2 C9_3: library part "CAP 0.10uF 35V", "CAP CER 0.10UF 35V X7R 0603/0805", Operating Temperature="-55°C ~ 125°C", Package=0603/0805, Rating=35V, Temperature Coefficient=X7R, Tolerance=10%
D1: library part "DIODE ZENER 12V 1W", "Zener Diode 12 V 1 W ±5% Surface Mount SMA", Mfr_Name="Diodes Inc", Supplier Part Number 1=621-SMAZ12-F, Copyright="Copyright (C) 2021 Ultra Librarian. All rights reserved.", Digi-Key_Part_Number_1=SMAZ12-FDICT-ND, Digi-Key_Part_Number_2=SMAZ12-FDIDKR-ND, Digi-Key_Part_Number_3=SMAZ12-FDITR-ND, Manufacturer_Part_Number=SMAZ12-13-F, RefDes=RefDes, Supplier 1=Mouser, Supplier 2=Newark, Supplier 3=Digi-Key, Supplier Part Number 2=23T8541, Supplier Part Number 3=SMAZ12-FDICT-ND, Type=DEV
D2 D3 D4: library part "LED GREEN SMD", "Typical RED, GREEN, YELLOW, AMBER GaAs LED", Color=Green, Current - Test=20mA, Package=1206, Voltage - Forward (Vf) (Typ)=2V, Lens Transparency=Clear
J1: library part "CN HDR 10POS MOLEX 0430451012", "CONN HEADER VERT 10POS 3MM", Color=Black, Contact Resistance=10mR, Flammability Rating="UL94 V-0", Manufacturer=Molex, Manufacturer Part Number=0430451012, Max Operating Temperature=105°C, Max Voltage Rating (AC)=250V, Min Operating Temperature=-40°C, Supplier Part Number 1=WM1793-ND, Category="Headers and Wire Housings", ComponentLink1Description=http://components.arrow.com/part/dataview/0323_01052363?src-supplier=Arrow+Europe, ComponentLink1URL=http://components.arrow.com/part/dataview/0323_01052363?src-supplier=Arrow+Europe, ComponentLink2Description=http://components.arrow.com/part/dataview/2943140S3689940N3303?src-supplier=Arrow+Electronics, ComponentLink2URL=http://components.arrow.com/part/dataview/2943140S3689940N3303?src-supplier=Arrow+Electronics, Connector Type="Male Pin", Contact Material=Brass, Contact Plating=Tin, Contact Type="Male Pin", Depth=8.77mm, Fastening Type=Ramp, Housing Color=Black, Housing Material=Polymer, Length=19.15mm, Mount="Through Hole", Number of Contacts=10, Number of Ports=1, Number of Positions=10, Number of Rows=2, Number of Terminals/Pins=10, Orientation=Straight, Packaging=Tray, Pitch=0.118inch, Pricing 1="1=2.46000, 10=2.09300, 80=1.72925, 1224=1.36521, 6120=1.21049 (USD)", RoHS=Yes, RoHS Compliant=Yes, Row Spacing=0.118inch, Series="Micro-Fit 3.0™ 43045", Stock 1=22123, Supplier 1=Digi-Key, Termination=Solder
J2: "SSQ - Samtec 2.54mm Square Tail Dual Row Socket Strip 8.5mm Profile", Package=None, Availability="In Stock", Check_prices=https://www.snapeda.com/parts/SSQ-120-22-G-D/Samtec/view-part/3393219/?ref=eda, Digikey=S6104-ND, MF=Samtec, MP=SSQ-120-22-G-D, Price=None, Purchase-URL=https://pricing.snapeda.com/search/part/SSQ-120-22-G-D/?ref=eda, SnapEDA_Link=https://www.snapeda.com/parts/SSQ-120-22-G-D/Samtec/view-part/3393219/?ref=snap
J3_1 J3_2 J3_3 J3_4 J3_5: library part "CN HDR 4POS Molex CN HDR 4POS Molex 39299044 VERT", "Molex 39299044 4POS Minifit / dual row, vertical", Supplier Part Number 1=WM7336-ND, Supplier 1=Digi-Key
J4_1 J4_2 J4_3 J4_4 J4_5: library part "CN 5POS JST ZR", "Connector Header Through Hole 5 position 0.059 (1.50mm)", Package=None, Supplier Part Number 1=455-1660-ND, Availability=Warning, Check_prices=https://www.snapeda.com/parts/B5B-ZR(LF)(SN)/JST%20Sales%20America%20Inc./view-part/214617/?ref=eda, MF="JST Sales", MP=B5B-ZR(LF)(SN), Price=None, Purchase-URL=https://pricing.snapeda.com/search/part/B5B-ZR(LF)(SN)/?ref=eda, SnapEDA_Link=https://www.snapeda.com/parts/B5B-ZR(LF)(SN)/JST%20Sales%20America%20Inc./view-part/214617/?ref=snap, Supplier 1=Digi-Key, Supplier 2="Future Electronics", Supplier Part Number 2=5800651
P2_1 P2_2 P2_3 P2_4 P2_5: library part TRINAMIC_BOB
Q1: library part "MOSFET IPB80P03P4L-04", "P-Channel 30 V 80A (Tc) 137W (Tc) Surface Mount PG-TO263-3-2", Manufacturer_Name=Infineon, Mouser Part Number=726-IPB80P03P4L-04, Datasheet Link=https://componentsearchengine.com//IPB80P03P4L-04.pdf, Height=4.5mm, Manufacturer_Part_Number=IPB80P03P4L-04, Mouser Price/Stock=https://www.mouser.co.uk/ProductDetail/Infineon-Technologies/IPB80P03P4L-04?qs=wK%252BoHS4yu562EimsoDeBJQ%3D%3D, Supplier 1=Mouser, Supplier Part Number 1=726-IPB80P03P4L-04
R1: library part "RES 47k 1/8W - 5%", "RES SMD 47k OHM 5% 1/8W 0805", Package=0805, Power (Watts)=0.125W, Tolerance=5%
R2: library part "RES 100k 1/8W - 5%", "RES SMD 100K OHM 5% 1/8W 0805/0603", Package=0805, Power (Watts)=0.125W, Tolerance=5%
R3: library part "RES 110.0 1/8W - 1%", "RES SMD 110 OHM 1% 1/8W 0805/0603", Package=0805, Power (Watts)=0.125W, Tolerance=1%
R4: library part "RES 330.0 1/8W - 5%", "RES SMD 330 OHM 5% 1/8W 0805", Package=0805, Power (Watts)=0.125W, Tolerance=5%
R5: library part "RES 1.96k 1/8W", "RES SMD 1.96K OHM 1% 1/8W 0805", Package=0805, Power (Watts)=0.125W, Tolerance=1%
R6_1 R6_2 R6_3 R7_1 R7_2 R7_3: library part "RES 4.7k 1/8W - 5%", "RES SMD 4.7k OHM 5% 1/8W 0805", Package=0805, Power (Watts)=0.125W, Tolerance=5%
R8_1 R8_2 R8_3 R8_4 R8_5 R8_6 R8_7 R8_8 R8_9 R8_10: library part "RES 22.0 1/8W", "RES SMD 22 OHM 5% 1/8W 0805", Package=0805, Power (Watts)=0.125W, Tolerance=5%
R9_1 R9_2 R9_3 R9_4 R9_5 R9_6 R9_7 R9_8 R9_9 R9_10 R10_1 R10_2 R10_3 R10_4 R10_5 R10_6 R10_7 R10_8 R10_9 R10_10: library part "RES 0 JUMPER", "RES SMD 0 OHM JUMPER GENERIC 0805/0603", Package=0805
S1: library part "SW SLIDE", "SWITCH SLIDE SPST 8.5A 125V", Rating="8.5A 125V", ComponentLink1Description=Digikey, ComponentLink1URL=https://www.digikey.ca/product-detail/en/zf-electronics/SRB22A2FBBNN/CH755-ND/446021, ComponentLink2Description=Datasheet, ComponentLink2URL=http://switches-sensors.zf.com/us/wp-content/uploads/sites/7/2012/10/Rocker_SRB_Datasheet1.pdf, Digikey=CWI333-ND, Digikey Link=https://www.digikey.com/en/products/detail/cw-industries/GF-123-0054/4089770, MF="CW Industries", MP=GF-123-0054, Price="1.25 CAD"
U1 U2 U3 U4 U5: library part 74LVC1G53DP,125, "74LVC Series 5.5 V SMT 2-Channel Analog Multiplexer/Demultiplexer - TSSOP-8", Case/Package=TSSOP, Manufacturer="NXP Semiconductors", Max Operating Temperature=125°C, Max Power Dissipation=250mW, Max Supply Voltage=5.5V, Min Operating Temperature=-40°C, Min Supply Voltage=1.65V, On-State Resistance=15R, Operating Supply Current=40uA, Package Quantity=3000, Supplier Part Number 1=1727-6078-1-ND, Bandwidth=300MHz, Category="Decoders and Multiplexers", ComponentLink1Description=https://datasheet.ciiva.com/2979/74lvc1g53-2979089.pdf?src-supplier=Arrow+Electronics, ComponentLink1URL=https://datasheet.ciiva.com/2979/74lvc1g53-2979089.pdf?src-supplier=Arrow+Electronics, ComponentLink2Description=https://datasheet.ciiva.com/2979/74lvc1g53-2979091.pdf?src-supplier=Avnet, ComponentLink2URL=https://datasheet.ciiva.com/2979/74lvc1g53-2979091.pdf?src-supplier=Avnet, ComponentLink3Description=https://datasheet.ciiva.com/2980/74lvc1g53-2980513.pdf?src-supplier=Avnet, ComponentLink3URL=https://datasheet.ciiva.com/2980/74lvc1g53-2980513.pdf?src-supplier=Avnet, ComponentLink4Description=https://datasheet.ciiva.com/1667/74lvc1g53-1667421.pdf?src-supplier=Digi-Key, ComponentLink4URL=https://datasheet.ciiva.com/1667/74lvc1g53-1667421.pdf?src-supplier=Digi-Key, ComponentLink5Description=https://datasheet.ciiva.com/1667/74lvc1g53-1667422.pdf?src-supplier=Digi-Key, ComponentLink5URL=https://datasheet.ciiva.com/1667/74lvc1g53-1667422.pdf?src-supplier=Digi-Key, ComponentLink6Description=https://datasheet.ciiva.com/1667/74lvc1g53-1667423.pdf?src-supplier=Digi-Key, ComponentLink6URL=https://datasheet.ciiva.com/1667/74lvc1g53-1667423.pdf?src-supplier=Digi-Key, ComponentLink7Description=https://datasheet.ciiva.com/16393/74lvc1g53-16393237.pdf?src-supplier=Future+Electronics, ComponentLink7URL=https://datasheet.ciiva.com/16393/74lvc1g53-16393237.pdf?src-supplier=Future+Electronics, ComponentLink8Description=https://datasheet.ciiva.com/46404/1759244-46404166.pdf?src-supplier=Element14, ComponentLink8URL=https://datasheet.ciiva.com/46404/1759244-46404166.pdf?src-supplier=Element14, Lead Free="Lead Free", Logic Function=Multiplexer,Demultiplexer,Mux,Demux, Manufacturer Part Number=74LVC1G53DP,125, Mount="Surface Mount", Number of Channels=2, Number of Circuits=1, Number of Functions=1, Number of Inputs=2, Number of Outputs=1, Number of Pins=8, Number of Switches=1, Packaging="Tape and Reel", Power Dissipation=250mW, Propagation Delay=0.8ns, Radiation Hardening=No, REACH SVHC="No SVHC", RoHS=Yes, RoHS Compliant=Yes, Series=74LVC, Supplier 1=Digi-Key, Supply Type=Single, Supply Voltage-Nom=5.5V, Turn-Off Delay Time=6.8ns, Turn-On Delay Time=6.7ns
U6_1 U6_2 U6_3: library part "ISO ADUM141D1BRQZ", "Digital Isolator CMOS 4-CH 150Mbps 16-Pin QSOP T/R", Case/Package=SSOP, Isolated Power=No, Manufacturer="Analog Devices", Manufacturer Part Number=ADUM141D1BRQZ-RL7, Max Operating Temperature=125°C, Min Operating Temperature=-40°C, Category="Interface ICs", Channel Type=Unidirectional, ComponentLink1Description=https://www.analog.com/media/en/technical-documentation/data-sheets/ADuM140D_140E_141D_141E_142D_142E.pdf?src-supplier=Digi-Key, ComponentLink1URL=https://www.analog.com/media/en/technical-documentation/data-sheets/ADuM140D_140E_141D_141E_142D_142E.pdf?src-supplier=Digi-Key, Data Rate=150Mbps, Mount="Surface Mount", Number of Channels=4, Number of Pins=16, Packaging="Tape and Reel", Pricing 1="1=3.87700, 10=3.47000, 25=3.26100, 50=3.22900, 100=2.78500, 250=2.67500 (USD)", Propagation Delay=13ns, Pulse Width Distortion (PWD)=3ns, RoHS=Yes, RoHS Compliant=Yes, Stock 1=341, Supplier 1="Arrow Electronics", Supplier Part Number 1=ADUM141D1BRQZ-RL7, Type="General Purpose"

## Via types
v1: diameter 27.56, hole 11.81, Top Copper to Bottom Copper, 156 vias
v2: diameter 27.56, hole 11.81, Top Copper to Bottom Copper, tented both sides, 141 vias
v3: diameter 23.62, hole 9.84, Top Copper to Bottom Copper, tented both sides, 93 vias

## Nets (pads, with @x,y where several pads share a name; then routed paths per layer and width w, separated by ;. In a path a pad name is that pad's centre, name@x,y a point inside that pad or via, vN(x,y) a via of type N, cw(c..) or ccw(c..) an arc to the next point about the centre after c; other vN are vias at no path point)
3V3: 2.1 C3.1 C9_1.2 C9_2.2 C9_3.2 J1.5 J4_1.3 J4_2.3 J4_3.3 J4_4.3 J4_5.3 P2_1.2 P2_2.2 P2_3.2 P2_4.2 P2_5.2 R3.2 U1.8 U2.8 U3.8 U4.8 U5.8 U6_1.16 U6_2.16 U6_3.16 | length 1710.8
  Top Copper w10: v2(610,2241.61) U1.8@972.24,2241.61 ; U3.8@2792.24,2231.61 2802.68,2231.61 2844.29,2190 3410,2190 P2_3.2@3490,2110
  Bottom Copper w10: v2(610,2241.61) P2_2.2@610,2470 ; v2(1610,2680) 1614.75,2680 1626.37,2668.39 U2.8@1662.24,2668.39 ; v2(3020,2610) 3059.37,2610 U4.8@3061.61,2612.24 ; U5.8@3777.76,2211.61 3777.76,2072.24 P2_5.2@3810,2040 ; C3.1@5017,3310 5023.22,3316.22 J1.5@5101.89,3316.22
  other v1: 3780,2820 3880,3020 3980,3220 4180,3220 3880,3420 4080,3420 4280,3420 4480,3420 3980,3620 4180,3620 4380,3620 3880,3820 4080,3820 4280,3820
  other v2: 3080,2830 3080,3230 3480,3230 3430,3330 3280,3630 3380,3830 3480,3830
  other v3: 3300,2780 3120,3180 3350,3270 3139.77,3516.78 3110,3890
5V: 1.1 C4.1 J1.4 P2_1.1 P2_2.1 P2_3.1 P2_4.1 P2_5.1 R4.2 | length 654.8
  Top Copper w10: 1.1@4530,3690 R4.2@4608.5,3690 4609.25,3689.25 4609.25,3630.75 v3(4610,3630)
  Bottom Copper w10: v3(4610,3200) v3(4610,3630) ; C4.1@5017,3200 5018.89,3198.11 J1.4@5101.89,3198.11
AUDIO_MCLK: J2.08
CAM_AF_EN: J2.30 R8_7.2 | length 205.4
  Bottom Copper w10: R8_7.2@1830,3377 1837.5,3377 1970,3509.5 J2.30@1970,3520
CTRL_EN: J2.39 P2_1.30 P2_2.30 P2_3.30 P2_4.30 P2_5.30 | length 10209.2
  Top Copper w5: J2.39@2470,3620 2640,3620 2691.92,3568.08 2897.17,3568.08 2905.25,3560 v3(2910,3560) ; v3(3120,3550) 3141.3,3571.3 3318.7,3571.3 v3(3319.14,3570.86) ; v3(3319.14,2930.86) 3493.19,2756.81 v3(3670.37,2756.81)
  Bottom Copper w5: P2_1.30@585.21,224.79 760,50 2350,50 ; P2_2.30@1910,570 1980,500 1980,420 2350,50 ; v3(2910,3560) 3110,3560 v3(3120,3550) ; v3(3319.14,2930.86) v3(3319.14,3570.86) ; v3(3670.37,2756.81) 3700,2727.18 3700,2170 3641.97,2111.97 3641.97,1881.97 3600,1840 3600,670 P2_4.30@3500,570 3650,420 3650,190 v3(3510,50) ; P2_5.30@5110,140 5020,50 v3(3510,50) ; 2350,50 v3(3510,50)
ENC_1_N: ENC_N1_1.1 J4_1.1 P2_1.5 | length 1575.1
  Top Copper w5: J4_1.1@138.83,2346.1 393.9,2346.1 540,2200 1516.99,2200 P2_1.5@1613.45,2103.54
ENC_2_N: ENC_N1_2.1 J4_2.1 P2_2.5 | length 1194.4
  Top Copper w5: J4_2.1@138.83,2926.1 144.94,2920 v2(860,2920)
  Bottom Copper w5: v2(860,2920) 910,2870 P2_2.5@910,2470
ENC_3_N: ENC_N1_3.1 J4_3.1 P2_3.5 | length 1600.6
  Top Copper w5: v3(3190,1630) 3650,1630 3780,1760 4020,1760 4047.17,1732.83 J4_3.1@4047.17,1699.06
  Bottom Copper w5: v3(3190,1630) P2_3.5@3190,2137.4 ; ENC_N1_3.1@4047.17,1561.89 J4_3.1@4047.17,1699.06
ENC_4_N: ENC_N1_4.1 J4_4.1 P2_4.5 | length 3295.1
  Top Copper w5: v2(2550,1520) 4050,1520 4320,1790 4520,1790 4557.17,1752.83 J4_4.1@4557.17,1700
  Bottom Copper w5: P2_4.5@2500,2470 2540,2430 2540,1534.21 2550,1524.21 v2(2550,1520) ; ENC_N1_4.1@4557.17,1562.83 J4_4.1@4557.17,1700
ENC_5_N: ENC_N1_5.1 J4_5.1 P2_5.5 | length 1334.6
  Top Copper w5: v3(4700,1760) v3(5060,1760)
  Bottom Copper w5: P2_5.5@4110,2040 4250,1900 4680,1900 4700,1880 v3(4700,1760) ; ENC_N1_5.1@5057.17,1562.83 5057.17,1700 5058.58,1701.42 5058.58,1758.58 v3(5060,1760)
ENC_A_1: ENC_A1_1.1 J4_1.5 P2_1.7 | length 1303.8
  Top Copper w5: J4_1.5@138.83,2109.88 276,2109.88 276.12,2110 ENC_A1_1.1@390,2110 440,2160 1360,2160 P2_1.7@1403.73,2116.27
ENC_A_2: ENC_A1_2.1 J4_2.5 P2_2.7 | length 1187.8
  Top Copper w5: J4_2.5@138.83,2689.88 147.2,2698.25 161.88,2698.25 163.63,2700 1075.79,2700 1105.79,2670 v2(1110,2670)
  Bottom Copper w5: P2_2.7@1110,2470 v2(1110,2670)
ENC_A_3: ENC_A1_3.1 J4_3.5 P2_3.7 | length 1556.4
  Top Copper w5: v3(2990,1570) 3681.89,1570 J4_3.5@3811.89,1700
  Bottom Copper w5: P2_3.7@2962.2,2110.41 P2_3.7@2962.58,2106.95 ; v3(2990,1570) P2_3.7@2990,2110 ; ENC_A1_3.1@3810.94,1561.89 J4_3.5@3810.94,1699.05
ENC_A_4: ENC_A1_4.1 J4_4.5 P2_4.7 | length 2858.4
  Top Copper w5: v2(2750,1445.72) 2754.28,1450 4040,1450 4290,1700 J4_4.5@4320.94,1700
  Bottom Copper w5: P2_4.7@2700,2470 2700,2240 2740,2200 2740,1459.93 2750,1449.93 v2(2750,1445.72) ; ENC_A1_4.1@4320.94,1562.83 J4_4.5@4320.94,1700
ENC_A_5: ENC_A1_5.1 J4_5.5 P2_5.7 | length 917.3
  Bottom Copper w5: P2_5.7@4310,2040 4380,1970 4770,1970 4820.94,1919.06 4820.94,1700 ENC_A1_5.1@4820.94,1562.83
ENC_B_1: ENC_B1_1.1 J4_1.4 P2_1.6 | length 1421
  Top Copper w5: J4_1.4@140,2170.94 195.16,2226.1 393.9,2226.1 440,2180 1430,2180 P2_1.6@1492.98,2117.02
ENC_B_2: ENC_B1_2.1 J4_2.4 P2_2.6 | length 1183.6
  Top Copper w5: J4_2.4@138.83,2748.94 178.83,2748.94 236,2806.1 ENC_B1_2.1@383.9,2806.1 ; ENC_B1_2.1@390,2800 950,2800 v2(1010,2740)
  Bottom Copper w5: P2_2.6@1010,2470 v2(1010,2740)
ENC_B_3: ENC_B1_3.1 J4_3.4 P2_3.6 | length 1539.4
  Top Copper w5: v3(3090,1600) 3650,1600 3790,1740 3840,1740 3870.94,1709.06 J4_3.4@3870.94,1700
  Bottom Copper w5: v3(3090,1600) P2_3.6@3090,2117.74 ; J4_3.4@3870,1699.06 3870,1619.06 ENC_B1_3.1@3927.17,1561.89
ENC_B_4: ENC_B1_4.1 J4_4.4 P2_4.6 | length 3088.2
  Top Copper w5: v2(2650,1470) 4030,1470 4320,1760 4360,1760 4380,1740 J4_4.4@4380,1700
  Bottom Copper w5: P2_4.6@2600,2470 2590,2460 2590,2210 2640,2160 2640,1484.21 2650,1474.21 v2(2650,1470) ; J4_4.4@4380,1700 4380,1620 ENC_B1_4.1@4437.17,1562.83
ENC_B_5: ENC_B1_5.1 J4_5.4 P2_5.6 | length 1072.3
  Top Copper w5: v3(4780,1820) v3(4880,1820)
  Bottom Copper w5: P2_5.6@4210,2040 4310,1940 4711.81,1940 4780,1871.81 v3(4780,1820) ; v3(4880,1820) 4880,1700 4880,1650 4937.17,1592.83 ENC_B1_5.1@4937.17,1562.83